# Altium PCB EchoSAT 2 PCB.PcbDoc
Units mm, origin at the board's own origin, x right, y up, seen from the top; angles counter-clockwise.
Board outline 47.6 x 56 mm, 2 copper layers (Top Layer, Bottom Layer); 45 components, 44 nets, 192 pads, 21 vias.
Unrouted connection lines stored in the file: 33.
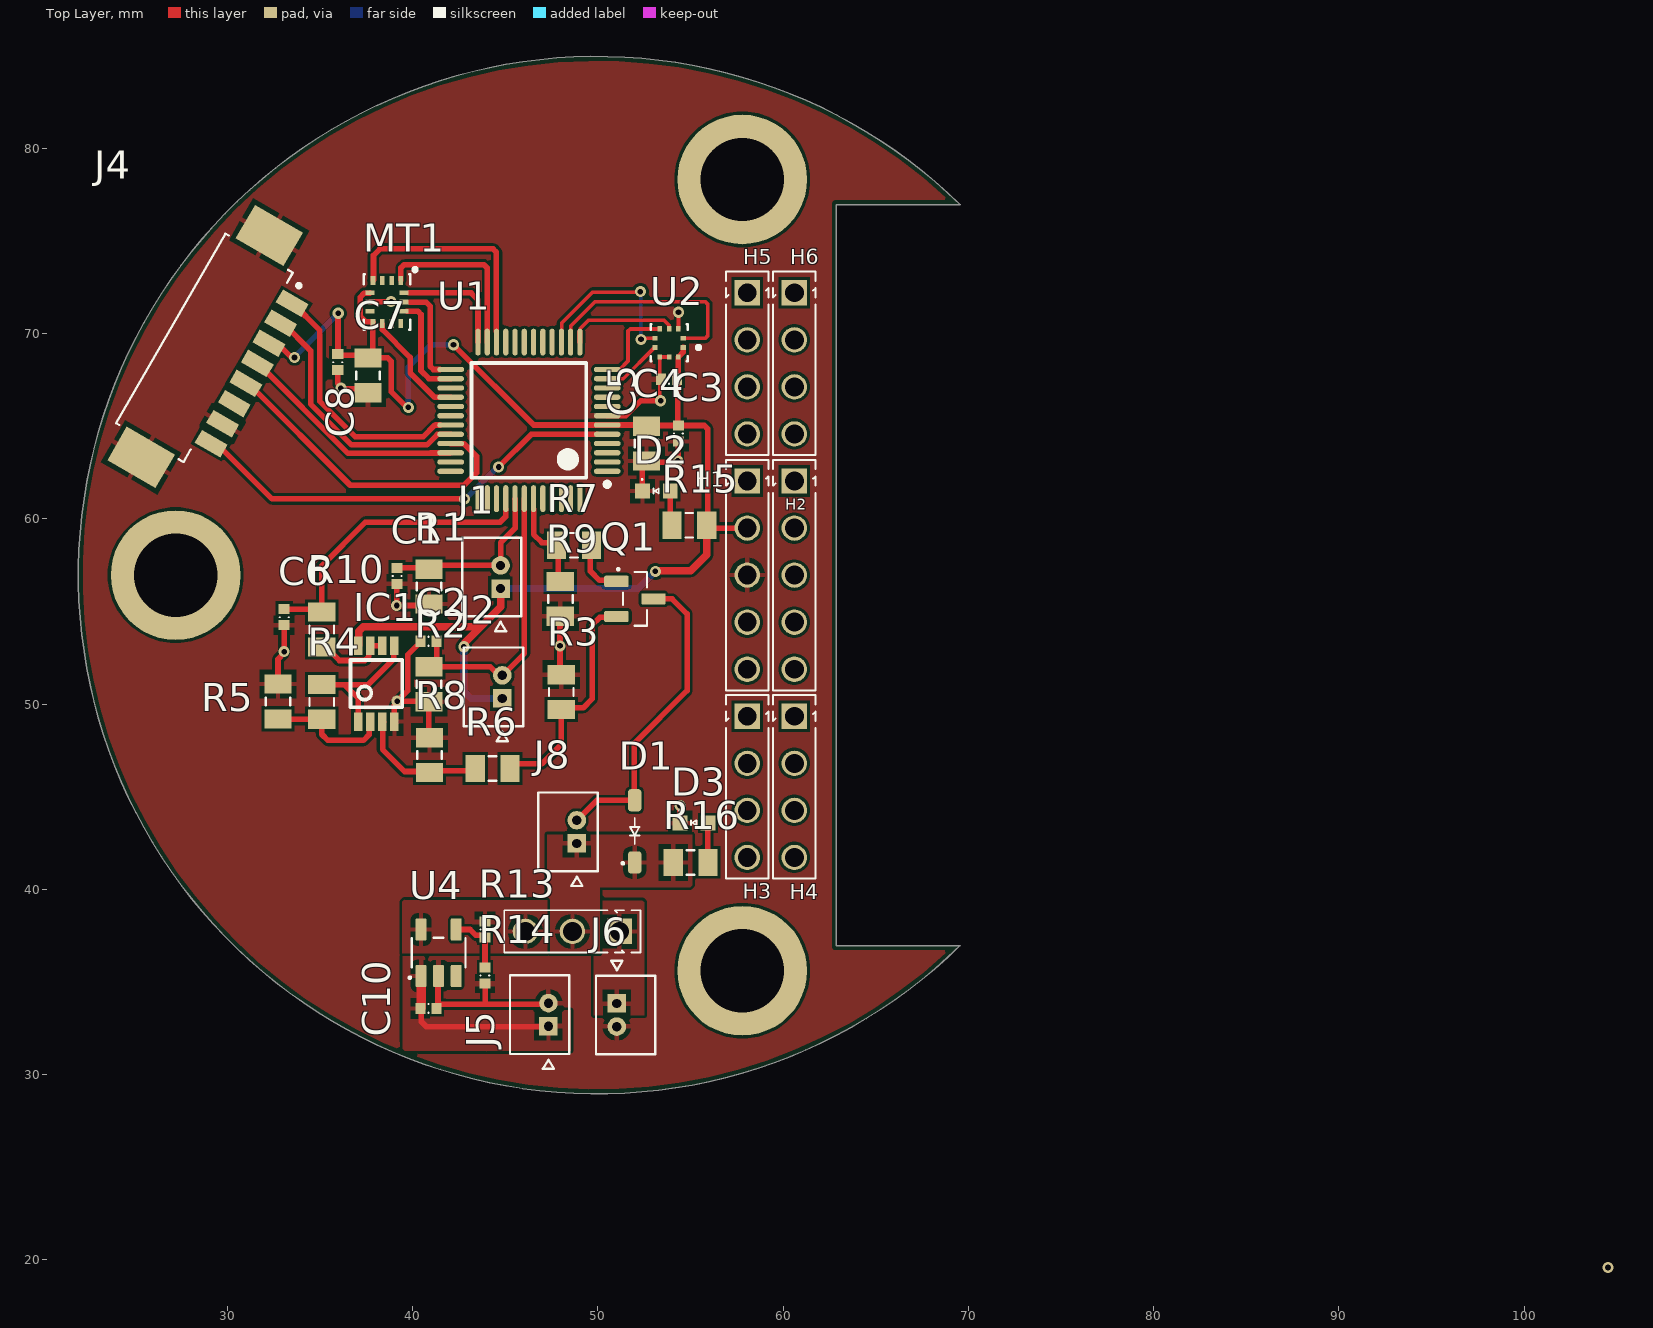
[diagram p0: Top Layer view]
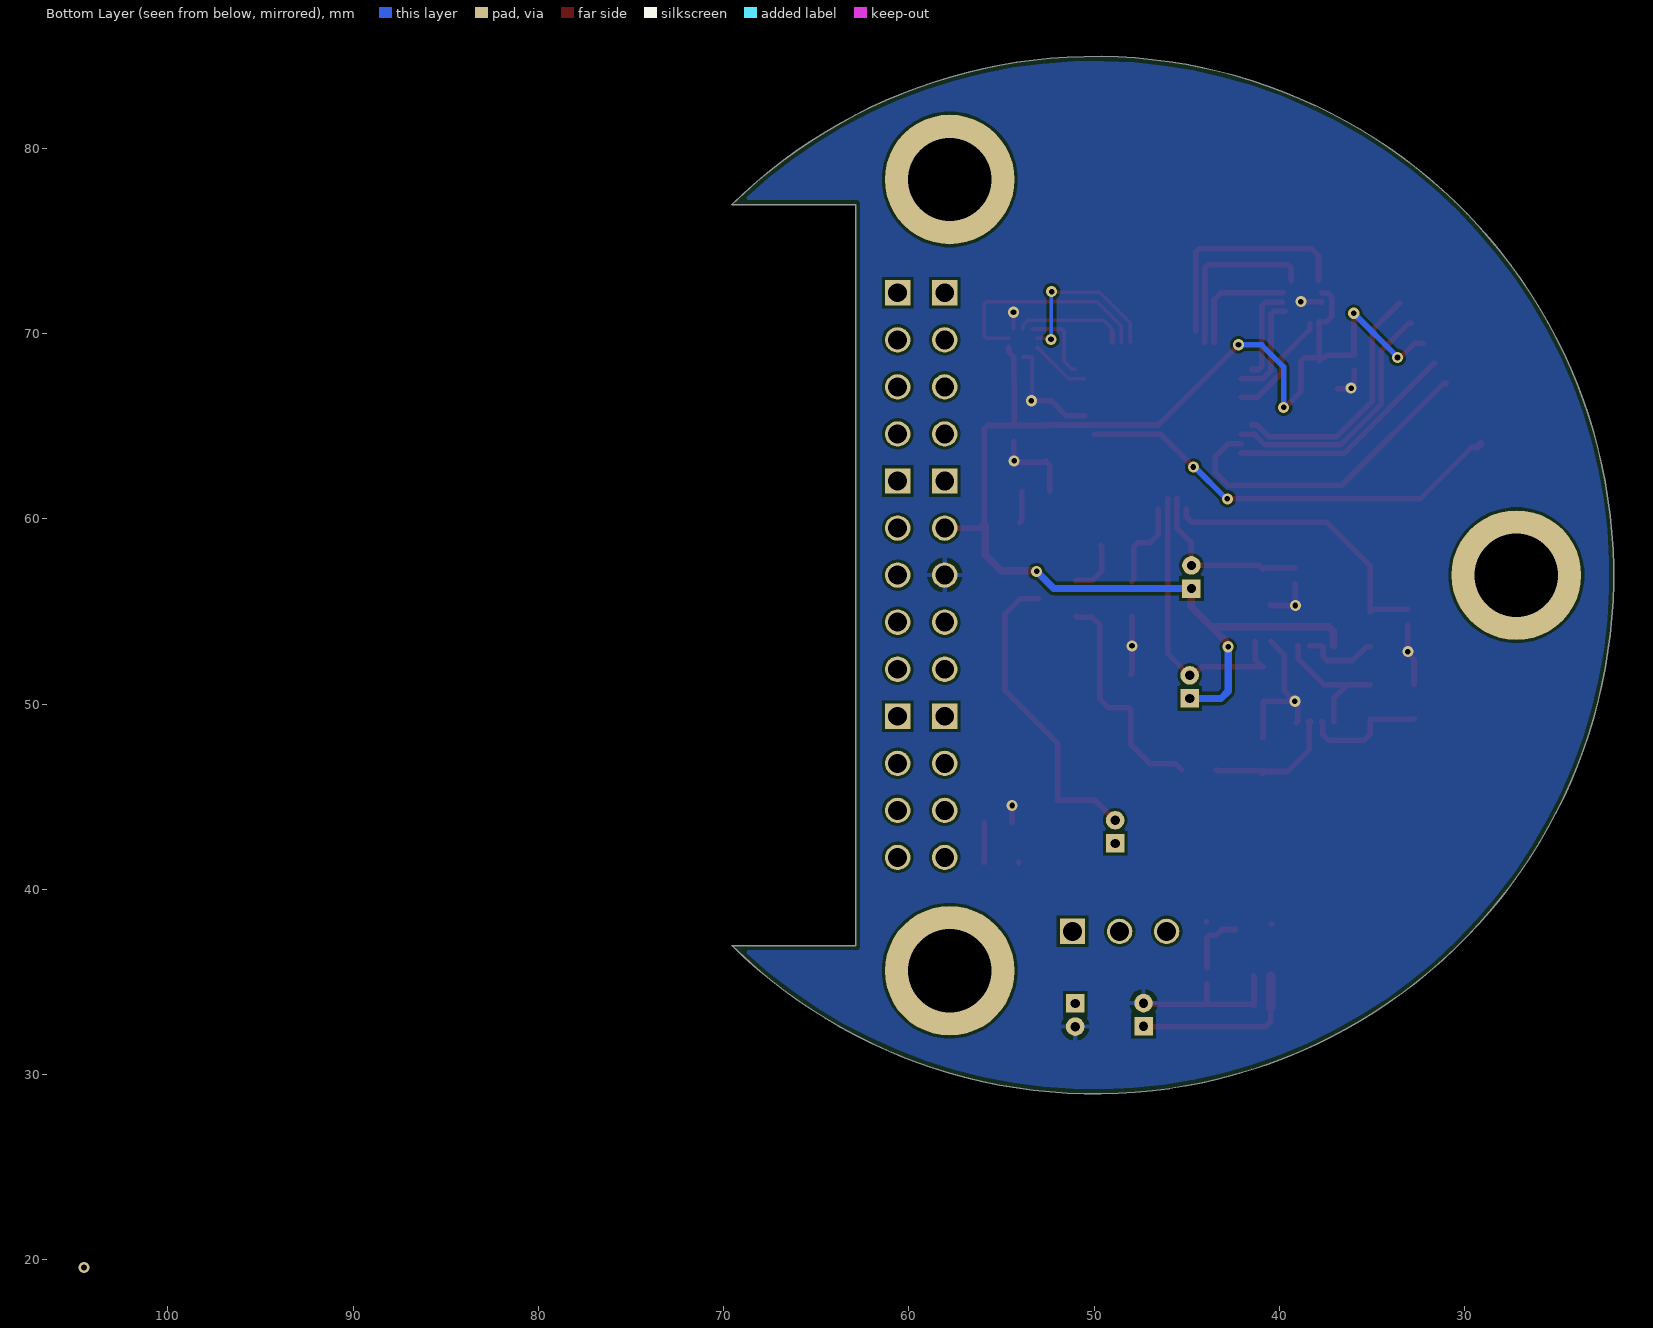
[diagram p1: Bottom Layer view, seen from below]
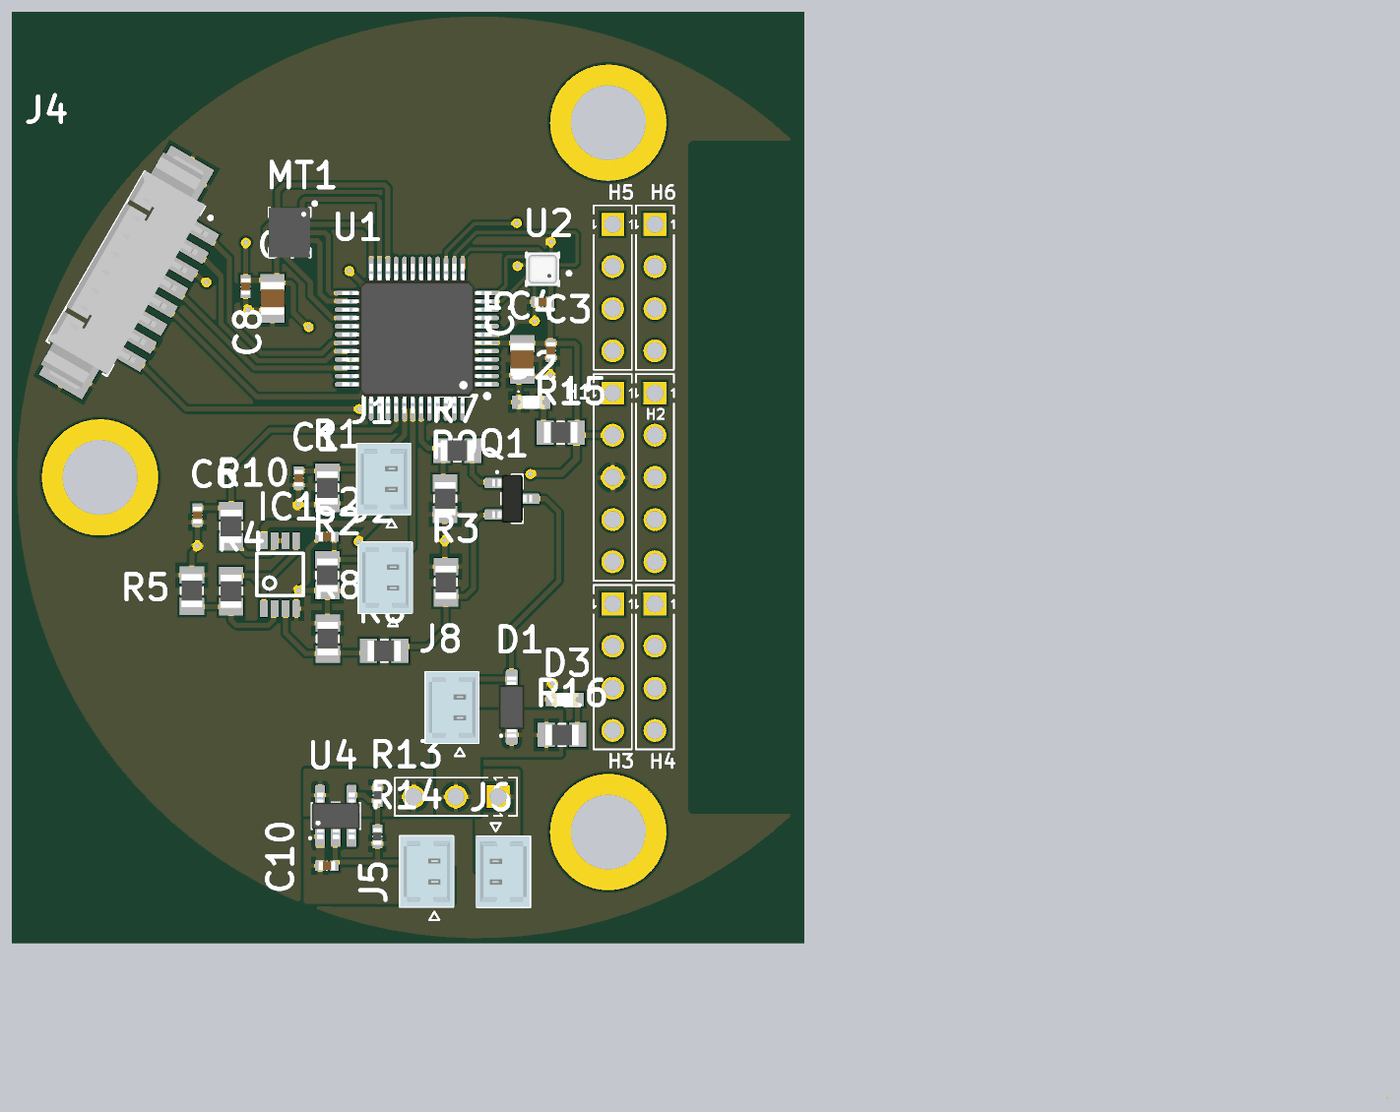
[diagram p2: 3D render of the assembled board from above, using the file's embedded part models]

## Layer stack, top to bottom
Top Solder: solder mask 0.0102, Solder Resist, Dk 3.5
Top Layer: signal copper 0.0356
Dielectric 1: dielectric 0.32, FR-4, Dk 4.8
Bottom Layer: signal copper 0.0356
Bottom Solder: solder mask 0.0102, Solder Resist, Dk 3.5

## Board outline
69.56,36.96 cw(c49.964,56.96) 69.56,76.96 69.564,76.96 62.877,76.96 62.877,36.96

## Design rules (kind name [scope] priority, off if disabled: settings)
BoardOutlineClearance [All] p1: gap=0.254 ignorepadtopadclearanceinfootprint=FALSE except(0: Arc-SplitContinuation Track-SplitContinuation SMDPad-SplitContinuation THPad-SplitContinuation Via-SplitContinuation Fill-SplitContinuation Poly-SplitContinuation Region-SplitContinuation Text-SplitContinuation)
Clearance [All] p1: gap=0.152 ignorepadtopadclearanceinfootprint=FALSE
ComponentClearance [All] p1: gap=0.1 collisioncheckmode=3 verticalgap=0.254 showdistances=FALSE
HoleSize [All] p1: absolutevalues=TRUE maxlimit=6.2 minlimit=0.3 maxpercent=80.000 minpercent=20.000
MinimumAnnularRing [All] p1: minimumring=0.15
MinimumSolderMaskSliver [All] p1: minsoldermaskwidth=0.1
PolygonConnect ViaConnect [IsVia] p1: connectstyle=Direct reliefconductorwidth=0.254 reliefentries=4 polygonreliefangle="90 Angle" airgapwidth=0.254
PolygonConnect [All] p2: connectstyle=Relief reliefconductorwidth=0.254 reliefentries=4 polygonreliefangle="90 Angle" airgapwidth=0.254
RoutingVias [All] p1: holewidth=0.3 width=0.6 viastyle="Through Hole" minholewidth=0.3 minwidth=0.5 maxholewidth=1 maxwidth=5
SilkToSilkClearance [All] p1: silktosilkclearance=0.1
SilkToSolderMaskClearance [IsPad] p1: minsilkscreentomaskgap=0.1 clearancetoexposedcopper=TRUE
SolderMaskExpansion [All] p1: expansion=0.051 istentingtop=FALSE
SupplyNets "Schematic Supply Nets_7" [InNet('V_Reg')] p1: voltage=0.000
SupplyNets "Schematic Supply Nets_6" [InNet('5V')] p2: voltage=0.000
SupplyNets "Schematic Supply Nets_5" [InNet('VBat_Reg')] p3: voltage=0.000
SupplyNets "Schematic Supply Nets_4" [InNet('1V8')] p4: voltage=0.000
SupplyNets "Schematic Supply Nets_3" [InNet('GND')] p5: voltage=0.000
SupplyNets "Schematic Supply Nets_2" [InNet('V_Coil')] p6: voltage=0.000
SupplyNets "Schematic Supply Nets_1" [InNet('3V3')] p7: voltage=0.000
SupplyNets "Schematic Supply Nets" [InNet('VBat')] p8: voltage=0.000
Width [All] p1: maxlimit=25.4 minlimit=0.15 preferedwidth=0.3
25 further rules are at their usual default settings.

## Classes and differential pairs
component class "EchoSAT 2 PCB": C1 C2 C3 C4 C5 C6 C7 C8 C10 D1 D2 D3 H1 H2 H3 H4 H5 H6 J1 J2 J4 J5 J6 J8 MT1 Q1 R1 R2 R3 R4 R5 R6 R7 R8 R9 R10 R14 R15 R16 U1 U2 U4

## Components (designator, comment, footprint, x,y, rotation, side; value= is the part's Value field where it differs from the comment)
C1 "100nF" CAPACITOR_0402_1005M_55N 39.167,56.921 r90 top
C2 "100nF" CAPACITOR_0402_1005M_55N 40.869,53.391 r0 top
C3 "100nF" CAPACITOR_0402_1005M_55N 54.354,64.603 r90 top
C4 "22uF" CAPACITOR_0805_2012M-70N 52.624,64.059 r90 top
C5 "100nF" CAPACITOR_0402_1005M_55N 53.853,67.531 r0 top
C6 "100nF" CAPACITOR_0402_1005M_55N 33.071,54.686 r90 top
C7 "22uF" CAPACITOR_0805_2012M-70N 37.592,67.742 r90 top
C8 "100nF" CAPACITOR_0402_1005M_55N 35.966,68.453 r90 top
C10 "100nF" CAPACITOR_0402_1005M_55N 40.869,33.571 r180 top
D1 "BZT52C5V1-TP" SOD123-1.35mm-N 51.994,43.129 r90 top value=5.1V
D2 "LTST-C190 Series" LED_0603_1608M_0.80mm 53.162,61.493 r0 top
D3 "LTST-C190 Series" LED_0603_1608M_0.80mm 55.194,43.586 r0 top
H1 "HDR,2.54mm,1x5" HEADER_2.54MM_1x5PIN 58.071,56.96 r270 top locked
H2 "HDR,2.54mm,1x5" HEADER_2.54MM_1x5PIN 60.611,56.96 r270 top locked
H3 "HDR,2.54mm,1x4" HEADER_2.54MM_1x4PIN 58.071,45.53 r270 top locked
H4 "HDR,2.54mm,1x4" HEADER_2.54MM_1x4PIN 60.611,45.53 r270 top locked
H5 "HDR,2.54mm,1x4" HEADER_2.54MM_1x4PIN 58.071,68.39 r270 top locked
H6 "HDR,2.54mm,1x4" HEADER_2.54MM_1x4PIN 60.611,68.39 r270 top locked
IC1 "NCS2333DMR2G" *MSOP8 38.049,51.105 r0 top
J1 "0530470210" MOLEX_0530470210 44.755,56.861 r270 top
J2 "0530470210" MOLEX_0530470210 44.849,50.927 r270 top
J4 "0532610871" MOLEX_0532610871 28.805,69.296 r240 top
J5 "0530470210" MOLEX_0530470210 47.338,33.232 r270 top
J6 "0530470210" MOLEX_0530470210 51.029,33.213 r90 top
J8 "0530470210" MOLEX_0530470210 48.87,43.104 r270 top
MT1 "ICM-42670-P" XDCR_ICM-42670-P 38.621,71.702 r270 top
Q1 "AS2312" SOT23-3N-1.15mm 52.01,55.677 r0 top
R1 "10k" RESISTOR_0805_2012M-50N 40.894,56.337 r90 top
R2 "*" RESISTOR_0805_2012M-50N 40.886,51.069 r90 top
R3 "*" RESISTOR_0805_2012M-50N 48.031,50.647 r270 top
R4 "*" RESISTOR_0805_2012M-50N 35.103,50.114 r90 top
R5 "*" RESISTOR_0805_2012M-50N 32.741,50.14 r90 top
R6 "*" RESISTOR_0805_2012M-50N 44.322,46.519 r0 top
R7 "*" RESISTOR_0805_2012M-50N 48.717,58.572 r0 top
R8 "*" RESISTOR_0805_2012M-50N 40.919,47.244 r90 top
R9 "*" RESISTOR_0805_2012M-50N 47.981,55.677 r90 top
R10 "*" Resistor_0805_2012M-50N 35.103,54.026 r90 top
R13 "*" RESISTOR_0402_1005M_37N 43.919,37.822 r90 top
R14 "*" RESISTOR_0402_1005M_37N 43.909,35.34 r90 top
R15 "*" RESISTOR_0805_2012M-50N 54.942,59.653 r0 top
R16 "*" RESISTOR_0805_2012M-50N 55.016,41.453 r180 top
U1 "MSP430FR2355TPT" LQFP_PT_48_N 46.286,65.313 r180 top
U2 "BMP390L" XDCR_BMP390L 53.853,69.496 r270 top
U4 "TLV75801PDBVR" SOT23-5N-1.45mm 41.409,36.577 r90 top
? "HDR,2.54mm,1x3" HEADER_2.54MM_1x3PIN 48.633,37.728 r180 top locked

## Footprints (in the part's own frame and the unit in brackets; to place one, negate y for a bottom-side part, rotate by r counter-clockwise, add the part's x,y. Pads: shape width x height; smd on the part's side, far side on the other; paste and mask are expansions set on the pad)
*MSOP8 [mm]
  rect 0.45x1 smd: 1(-0.975,-2.05) 2(-0.325,-2.05) 3(0.325,-2.05) 4(0.975,-2.05) 5(0.975,2.05) 6(0.325,2.05) 7(-0.325,2.05) 8(-0.975,2.05)
  silkscreen extent -1.4,-1.27 1.4,1.27
CAPACITOR_0402_1005M_55N [mm] "Capacitor, 0402 (1005 metric), 0.55mm height, nominal pads"
  rect 0.54x0.6 smd mask+0.051: 1(-0.432,0) 2(0.432,0)
  silkscreen extent 0,-0.25 0,0.25, body extent -0.5,-0.28 0.5,0.27, height 0.48
CAPACITOR_0805_2012M-70N [mm] "Capacitor, 0805 (2012 metric), 0.7mm high, nominal pads,"
  rect 1.04x1.47 smd mask+0.051: 1(-0.94,0) 2(0.94,0)
  silkscreen extent -0.2,-0.64 0.2,0.64, body extent -1,-0.73 1,0.73, height 1.23
HEADER_2.54MM_1x3PIN [mm]
  rect 1.37x1.37 hole 1.02: 1(-2.54,0)
  round 1.37 hole 1.02: 2(0,0) 3(2.54,0)
  silkscreen extent -3.68,-1.14 3.68,1.14, body extent -3.68,-1.14 3.68,1.14, height 8.2
HEADER_2.54MM_1x4PIN [mm]
  rect 1.37x1.37 hole 1.02: 1(-3.81,0)
  round 1.37 hole 1.02: 2(-1.27,0) 3(1.27,0) 4(3.81,0)
  silkscreen extent -4.95,-1.14 4.95,1.14, body extent -4.95,-1.14 4.95,1.14, height 8.2
HEADER_2.54MM_1x5PIN [mm]
  rect 1.37x1.37 hole 1.02: 1(-5.08,0)
  round 1.37 hole 1.02: 2(-2.54,0) 3(0,0) 4(2.54,0) 5(5.08,0)
  silkscreen extent -6.22,-1.14 6.22,1.14, body extent -6.21,-1.14 6.22,1.14, height 8.2
LED_0603_1608M_0.80mm [mm] "LED, 0603 (1608 metric), 0.8mm high"
  rect 0.8x0.8 smd mask+0.051: A(0.75,0) C(-0.75,0)
  silkscreen extent -0.79,-0.12 0.13,0.66, body extent -0.8,-0.4 0.8,0.4, height 0.8
LQFP_PT_48_N [mm]
  oval 1.45x0.28 smd paste+0 mask+0.051: 1(-4.225,2.75) 2(-4.225,2.25) 3(-4.225,1.75) 4(-4.225,1.25) 5(-4.225,0.75) 6(-4.225,0.25) 7(-4.225,-0.25) 8(-4.225,-0.75) 9(-4.225,-1.25) 10(-4.225,-1.75) 11(-4.225,-2.25) 12(-4.225,-2.75) 25(4.225,-2.75) 26(4.225,-2.25) 27(4.225,-1.75) 28(4.225,-1.25) 29(4.225,-0.75) 30(4.225,-0.25) 31(4.225,0.25) 32(4.225,0.75) 33(4.225,1.25) 34(4.225,1.75) 35(4.225,2.25) 36(4.225,2.75)
  oval 0.28x1.45 smd paste+0 mask+0.051: 13(-2.75,-4.225) 14(-2.25,-4.225) 15(-1.75,-4.225) 16(-1.25,-4.225) 17(-0.75,-4.225) 18(-0.25,-4.225) 19(0.25,-4.225) 20(0.75,-4.225) 21(1.25,-4.225) 22(1.75,-4.225) 23(2.25,-4.225) 24(2.75,-4.225) 37(2.75,4.225) 38(2.25,4.225) 39(1.75,4.225) 40(1.25,4.225) 41(0.75,4.225) 42(0.25,4.225) 43(-0.25,4.225) 44(-0.75,4.225) 45(-1.25,4.225) 46(-1.75,4.225) 47(-2.25,4.225) 48(-2.75,4.225)
  silkscreen extent -4.35,-3.1 3.1,3.57, body extent -4.5,-4.5 4.5,4.5, height 1.6
MOLEX_0530470210 [mm]
  rect 1x1 hole 0.5 mask+0.051: 1(0.625,0)
  round 1 hole 0.5 mask+0.051: 2(-0.625,0)
  silkscreen extent -2.12,-2.07 2.93,1.13, body extent -2.12,-2.06 2.13,1.14, height 4.21
MOLEX_0532610871 [mm] "Header - Picoblade 08-pin, SMT, RA, 3.4mm height"
  rect 0.8x1.6 smd mask+0.051: 1(-4.375,2.9) 2(-3.125,2.9) 3(-1.875,2.9) 4(-0.625,2.9) 5(0.625,2.9) 6(1.875,2.9) 7(3.125,2.9) 8(4.375,2.9)
  rect 2.1x3 smd mask+0.051: MP1(-6.925,0) MP2(6.905,0)
  silkscreen extent -5.83,-2.1 5.99,2.83, body extent -7.57,-2.1 7.58,3.1, height 3.42
RESISTOR_0402_1005M_37N [mm] "Resistor, 0402 (1005 metric), 0.37mm height, nominal pads"
  rect 0.54x0.6 smd mask+0.051: 1(-0.432,0) 2(0.432,0)
  silkscreen extent 0,-0.25 0,0.25, body extent -0.5,-0.25 0.5,0.25, height 0.37
RESISTOR_0805_2012M-50N [mm] "Resistor, 0805 (2012 metric), nominal pads"
  rect 1.04x1.47 smd mask+0.051: 1(-0.94,0) 2(0.94,0)
  silkscreen extent -0.2,-0.66 0.2,0.66, body extent -1,-0.63 1,0.62, height 0.5
Resistor_0805_2012M-50N [mm] "Resistor, 0805 (2012 metric), nominal pads"
  rect 1.04x1.47 smd mask+0.051: 1(-0.94,0) 2(0.94,0)
  silkscreen extent -0.2,-0.66 0.2,0.66, body extent -1,-0.63 1,0.62, height 0.5
SOD123-1.35mm-N [mm] "SOD-123, 1.35mm high, nominal pads"
  rrect50% 1.21x0.73 smd mask+0.051: A(1.68,0) C(-1.68,0)
  silkscreen extent -1.75,-0.25 0.74,0.66, body extent -1.83,-0.78 1.82,0.77, height 1.5
SOT23-3N-1.15mm [mm] "SOT23, 3-pin, 1.15mm high, nominal pads"
  rrect25% 1.32x0.6 smd mask+0.051: 1(-1,0.95) 2(-1,-0.95) 3(1,0)
  silkscreen extent -0.93,-1.45 0.65,1.63, body extent -1.19,-1.45 1.21,1.45, height 0.91
SOT23-5N-1.45mm [mm] "SOT23, 5 pins, nominal pads, 1.45mm high"
  rrect25% 1.21x0.59 smd mask+0.051: 1(-1.255,0.95) 2(-1.255,0) 3(-1.255,-0.95) 4(1.255,-0.95) 5(1.255,0.95)
  silkscreen extent -1.37,-1.45 0.8,1.57, body extent -1.4,-1.45 1.4,1.45, height 1.45
XDCR_BMP390L [mm]
  rect 0.25x0.275 smd: 1(0.25,0.763) 2(-0.25,0.763) 6(-0.25,-0.763) 7(0.25,-0.763)
  rect 0.275x0.25 smd: 3(-0.763,0.5) 4(-0.763,0) 5(-0.763,-0.5) 8(0.763,-0.5) 9(0.763,0) 10(0.763,0.5)
  silkscreen extent -1,-1 1,1.69, body extent -1,-1 1,1, height 0.8
XDCR_ICM-42670-P [mm]
  rect 0.475x0.25 smd paste-1 mask+0.05: 1(-1.162,0.75) 2(-1.162,0.25) 3(-1.162,-0.25) 4(-1.162,-0.75) 8(1.162,-0.75) 9(1.162,-0.25) 10(1.162,0.25) 11(1.162,0.75)
  rect 0.25x0.475 smd paste-1 mask+0.05: 5(-0.5,-0.913) 6(0,-0.913) 7(0.5,-0.913) 12(0.5,0.913) 13(0,0.913) 14(-0.5,0.913)
  silkscreen extent -1.85,-1.25 1.5,1.61, body extent -1.5,-1.25 1.5,1.25, height 0.81

## Part data
C1 C2 C3 C5 C6 C8 C10: library part "GCM1555CxxxxxF Series", "Passive - Capacitor Series, C0G, 5pF ~ 1nF, 50V, 0402 (1005 Metric), ±1%, -55°C ~ 125°C", Capacitance at Rated Voltage=100%, Package=0402, Rated Voltage=50V, Temp Range="-55°C ~ 125°C", Temperature Coefficient=C0G, Tolerance=±1%, Value Range="5pF ~ 1nF", APSS Standard Part="APSS Standard", E Series=E24, Supplier 1=Digikey
C4 C7: library part C0805C226M9PACTU, "Passive - Capacitor, X5R, 22uF Max, 6.3V, 0805 (2012 Metric), ±20%, -55°C ~ 85°C. 8.8uF @ 5V", Capacitance at Rated Voltage=30%, Package=0805, Rated Voltage=6.3V, Supplier 1 Part No.=399-C0805C226M9PAC7800CT-ND, Temp Range="-55°C ~ 85°C", Temperature Coefficient=X5R, Tolerance=±20%, APSS Standard Part="APSS Standard", MF Part No.=C0805C226M9PACTU, Supplier 1=Digikey
D1: "Diode - Zener, 5V1, SOD-123", Package=SOD-123, Supplier 1 Part No.=BZT52C5V1-TPMSCT-ND, Temp Range="-65°C ~ 150°C", APSS Standard Part="APSS Standard", MF Part No.=BZT52C5V1-TP, Supplier 1=Digikey
D2 D3: "Diode - LED, 0603", Package=0603, Rated Voltage="5V Reverse", Temp Range="-30°C ~ 85°C", APSS Standard Part="APSS Standard", Supplier 1=Digikey
H1 H2: "Connector - 2.54mm, 1x5-pin"
H3 H4 H5 H6: "Connector - 2.54mm, 1x4-pin"
J1 J2 J5 J6 J8: "Connector - Picoblade 02-pin, TH, STR", Supplier 1 Part No.=WM1731-ND, APSS Standard Part="APSS Standard", MF Part No.=0530470210, Mounting Type=Through-hole, Orientation=Straight, Pins=2, Pitch=1.25mm, Supplier 1=Digikey
J4: "Connector - Picoblade 08-pin, SMT, RA", Supplier 1 Part No.=WM7626CT-ND, APSS Standard Part="APSS Standard", MF Part No.=0532610871, Mounting Type="Surface Mount", Orientation="Right Angle", Pins=8, Pitch=1.25mm, Supplier 1=Digikey
MT1: Package=None, Availability=Unavailable, MP=ICM-42670-P, Price=None
Q1: "Transistor - MOSFET, N-Channel AS2312", Package=SOT-23-3, Power=1.2W, Rated Voltage="20 Vds", Supplier 1 Part No.=4530-AS2312CT-ND, Temp Range="0°C ~ 150°C (TJ)", APSS Standard Part="APSS Standard", MF Part No.=AS2312, Supplier 1=Digikey
R1 R2 R3 R4 R5 R6 R7 R8 R9 R10 R15 R16: library part "Generic Resistor", "Passive - Resistor, Generic", Tolerance=?%
R13 R14: library part "RMCF0402JT Series", "Passive - Resistor Series, 0402, 5%, 1R - 20M, E24, 0.063W, 1/16W, ±100ppm/°C, -55°C ~ 155°C, 0402 (1005 Metric)", Package=0402, Power=1/16W, Rated Voltage=50V, Temp Range="-55°C ~ 155°C", Temperature Coefficient=±100ppm/°C, Tolerance=5%, Value Range="1 ~ 20M", APSS Standard Part="APSS Standard", E Series=E24, Supplier 1=Digikey
U1: "IC - Microcontroller, LQFP-48, 24MHz, 32KB FRAM, Op-Amps/PGAs, 12-bit DACs, 12-bit ADC, -40 to 105C", Package=LQFP-48, Rated Voltage=3.6V, Supplier 1 Part No.=296-50260-ND, Temp Range="-40°C ~ 105°C", APSS Standard Part="APSS Standard", MF Part No.=MSP430FR2355TPT, Supplier 1=Digikey
U2: "Pressure Sensor 4.35PSI ~ 18.13PSI (30kPa ~ 125kPa) Absolute - - 10-WFLGA", Package=None, Check_prices=https://www.snapeda.com/parts/BMP390L/Bosch+Sensortec/view-part/?ref=eda, MF="Bosch Sensortec", MP=BMP390L, SnapEDA_Link=https://www.snapeda.com/parts/BMP390L/Bosch+Sensortec/view-part/?ref=snap
U4: "IC - Regulator, LDO, 500 mA, Low Quiescent Current, SOT23-5", Package=SOT-23-5, Rated Voltage=6V, Supplier 1 Part No.=296-TLV75801PDBVRCT-ND, Temp Range="-40°C ~ 125°C (TJ)", APSS Standard Part="APSS Standard", MF Part No.=TLV75801PDBVR, Supplier 1=Digikey
?: "Connector - 2.54mm, 1x3-pin"
IC1: Check_prices=https://www.snapeda.com/parts/NCS2333DMR2G/Onsemi/view-part/?ref=eda, SnapEDA_Link=https://www.snapeda.com/parts/NCS2333DMR2G/Onsemi/view-part/?ref=snap

## Free pads (board coordinates)
  round 7 hole 4.5: 1(27.214,56.96) 1(57.801,35.603) 1(57.802,78.318)

## Via types
v1: diameter 0.6, hole 0.3, Top Layer to Bottom Layer, 21 vias

## Nets (pads, with @x,y where several pads share a name; then routed paths per layer and width w, separated by ;. In a path a pad name is that pad's centre, name@x,y a point inside that pad or via, vN(x,y) a via of type N, cw(c..) or ccw(c..) an arc to the next point about the centre after c; other vN are vias at no path point)
1V8: H1.1
3V3: C3.2 C4.2 C5.2 C7.2 C8.2 H1.2 IC1.8 J1.1 J2.1 J4.3 MT1.5 MT1.8 R15.2 U1.6 U2.1 U2.10 | length 79.8
  Top Layer w0.3: J4.3 32.713,69.47 33.418,68.764 33.572,68.764 v1(33.63,68.707) ; v1(35.992,71.095) 35.979,71.082 35.979,68.932 35.95,68.903 35.992,68.86 35.966,68.835 37.439,68.835 C7.2 C7.2@37.853,68.682 ; MT1.5 37.684,72.177 37.394,72.177 37.169,71.952 37.169,70.952 37.494,70.627 37.846,70.627 37.871,70.602 MT1.8 37.871,70.477 MT1.8@37.846,70.452 ; C7.2@37.853,68.54 C7.2@37.853,68.682 ; MT1.8@37.853,70.452 C7.2@37.853,68.682 ; v1(39.776,66.015) 39.699,66.015 38.85,66.863 38.85,68.506 38.674,68.682 C7.2@37.853,68.682 ; v1(42.215,69.393) 46.544,65.063 U1.6 52.235,65.063 52.237,65.065 C4.2@52.624,65.065 ; C4.2 52.661,65.035 55.753,65.035 55.929,64.86 55.929,59.815 R15.2@55.906,59.792 ; U2.10 54.616,68.996 U2.1 ; C3.2@54.354,65.049 54.32,65.084 54.32,67.496 54.354,67.531 U2.10 ; R15.2@55.963,59.734 56.197,59.5 H1.2
  Top Layer w0.4: IC1.8 37.099,53.18 37.099,53.94 37.334,54.175 43.68,54.175 ; v1(42.774,53.093) 42.812,53.131 42.812,53.306 43.68,54.175 ; J1.1 44.755,55.249 43.68,54.175 ; v1(53.115,57.16) 53.153,57.198 55.028,57.198 55.882,58.052 R15.2
  Bottom Layer w0.3: v1(33.63,68.707) 33.63,68.732 v1(35.992,71.095) ; v1(39.776,66.015) 39.776,68.201 40.969,69.393 v1(42.215,69.393)
  Bottom Layer w0.4: v1(42.774,53.093) 42.774,50.684 43.156,50.302 J2.1 ; J1.1 52.19,56.236 v1(53.115,57.16)
5V: H1.4
ACCL_CLK: MT1.13 U1.25 | length 5
  Top Layer w0.3: 39.844,71.683 40.748,71.683 40.949,71.482 40.949,68.234 41.125,68.058 U1.25@41.486,68.058
ACCL_CS: MT1.12 U1.26 | length 5.7
  Top Layer w0.3: MT1.12@39.701,71.214 40.283,71.214 40.459,71.039 40.459,67.992 40.884,67.566 41.486,67.566 41.489,67.563 U1.26
ACCL_INT1: MT1.4 U1.22 | length 12.5
  Top Layer w0.3: MT1.4 37.896,72.889 37.896,74.224 38.238,74.565 44.348,74.565 44.526,74.387 44.526,70.133 U1.22@44.526,70.113
ACCL_INT2: MT1.9 U1.28 | length 6
  Top Layer w0.3: MT1.9 38.371,70.209 39.871,68.709 39.871,67.883 41.192,66.563 U1.28
ACCL_MISO: MT1.1 U1.23 | length 9.5
  Top Layer w0.3: MT1.1 39.371,73.54 39.547,73.716 43.86,73.716 44.036,73.54 U1.23
ACCL_MOSI: MT1.14 U1.24 | length 6.2
  Top Layer w0.3: 39.794,72.192 43.161,72.192 43.536,71.817 U1.24
BMP_CLK: U1.14 U2.2 | length 11.9
  Top Layer w0.2: U1.14@48.546,69.548 48.546,70.408 49.851,71.713 55.814,71.713 55.931,71.596 55.931,69.863 55.814,69.746 54.653,69.746 U2.2
BMP_CS: U1.15 U2.6 | length 9.4
  Top Layer w0.2: U1.15@48.046,69.548 48.051,69.553 48.051,70.569 49.715,72.232 52.266,72.232 v1(52.299,72.266) ; v1(52.334,69.685) 52.395,69.747 U2.6@53.089,69.747
  Bottom Layer w0.2: v1(52.299,72.266) 52.316,72.248 52.316,69.702 v1(52.334,69.685)
BMP_INT: U1.11 U2.7 | length 3.3
  Top Layer w0.2: U1.11 51.382,67.563 53.04,69.221 53.066,69.221 U2.7
BMP_MISO: U1.12 U2.5 | length 4.2
  Top Layer w0.2: U1.12@51.025,68.075 51.029,68.078 51.198,68.078 51.638,68.519 51.638,70.134 51.755,70.251 U2.5@53.353,70.251
BMP_MOSI: U1.13 U2.4 | length 6
  Top Layer w0.2: U1.13@49.036,70.103 49.051,70.118 49.051,70.276 49.486,70.711 53.591,70.711 53.853,70.448 U2.4
  Top Layer w0.3: U1.13 U1.13@49.036,70.103
GND: C1.1 C2.1 C3.1 C4.1 C5.1 C6.1 C7.1 C8.1 C10.1 D2.C D3.C H1.3 IC1.4 J4.7 J4.MP1 J4.MP2 J5.2 J6.2 MT1.6 R1.1 R2.1 R3.1 R5.2 R8.2 R9.1 R14.1 U1.7 U2.3 U2.8 U2.9 U4.2 | length 41.9
  Top Layer w0.2: v1(53.391,66.37) 53.353,66.408 U2.8 U2.9 ; U2.3 54.356,70.261 54.356,71.148 v1(54.358,71.151)
  Top Layer w0.3: R5.2 32.741,52.421 33.071,52.751 C6.1 ; C8.1 35.966,67.304 36.131,67.14 v1(36.131,67.058) 36.159,67.03 C7.1@36.881,67.03 ; MT1.6 37.721,71.714 38.832,71.714 v1(38.844,71.727) ; IC1.4@39.091,48.988 IC1.4 39.024,49.924 39.172,50.072 v1(39.172,50.153) ; v1(39.141,55.321) v1@39.167,55.347 ; C1.1 39.154,56.477 39.154,55.359 v1@39.167,55.347 ; C2.1 40.437,53.361 39.747,52.671 39.747,50.729 v1(39.172,50.153) ; R1.1@40.509,55.363 40.468,55.321 39.192,55.321 v1@39.167,55.347 ; R8.2 40.886,48.217 R2.1 40.862,50.153 v1(39.172,50.153) ; C10.1@41.355,33.763 41.388,33.796 43.925,33.796 ; C10.1@41.377,33.738 41.377,35.29 U4.2 ; R14.1@43.925,34.892 43.925,33.796 ; J5.2 47.277,33.796 43.925,33.796 ; R9.1 47.961,54.717 v1(47.961,53.143) 47.961,51.657 R3.1 ; U1.7 50.521,65.573 51.516,65.573 52.313,66.37 v1(53.391,66.37) ; D2.C 52.412,62.907 C4.1 52.681,63.062 54.183,63.062 54.244,63.123 v1(54.325,63.123) 54.34,63.138 54.34,64.157 C3.1 ; v1(54.435,44.525) 54.44,44.52 54.44,43.591 D3.C
  other v1: 104.532,19.586 33.071,52.832
Isense: Q1.2 R3.2 R6.2 | length 12.6
  Top Layer w0.3: R6.2@45.288,46.457 45.609,46.777 46.98,46.777 48.031,47.828 R3.2 48.127,49.803 49.226,49.803 49.7,50.277 49.7,54.268 50.108,54.676 50.959,54.676 Q1.2
NetD1_A: D1.A J8.2 Q1.3 | length 17
  Top Layer w0.3: J8.2 49.95,44.809 D1.A ; D1.A@51.968,44.809 51.968,47.869 54.827,50.727 54.827,54.864 54.014,55.677 Q1.3
NetD2_A: D2.A R15.1 | length 1.7
  Top Layer w0.3: D2.A 53.912,59.905 R15.1@54.026,59.792
NetD3_A: D3.A R16.1 | length 2.1
  Top Layer w0.3: D3.A 55.944,41.465 R16.1
NetIC1_2: IC1.2 R4.1 R5.1 | length 6.7
  Top Layer w0.3: R5.1 32.766,49.174 R4.1 35.103,48.371 35.43,48.044 37.356,48.044 37.665,48.353 37.665,48.996 IC1.2
NetIC1_3: IC1.3 R6.1 R8.1 | length 7.1
  Top Layer w0.3: IC1.3@38.384,49.045 38.384,47.547 39.57,46.361 R8.1@40.849,46.361 ; R8.1 41.014,46.398 43.35,46.398 R6.1@43.408,46.457
  Top Layer w0.4: IC1.3 IC1.3@38.399,49.03 ; R8.1@40.849,46.361 R8.1@40.919,46.291
NetIC1_6: IC1.6 IC1.7 R10.1 | length 4.2
  Top Layer w0.3: R10.1 35.318,53.086 36.051,52.352 37.424,52.352 37.649,52.577 37.649,53.08 IC1.7 IC1.6
NetJ3_9: 
NetQ1_1: Q1.1 R7.2 | length 3
  Top Layer w0.3: R7.2 49.605,58.52 49.605,57.17 50.103,56.672 50.964,56.672 Q1.1@50.989,56.647
NetR13_1: R13.1 R14.2 U4.4 | length 3.4
  Top Layer w0.3: U4.4 43.104,37.832 43.426,37.51 43.799,37.51 R13.1 43.914,37.385 43.914,35.777 R14.2
PGRM_CLK: J4.5 U1.33 | length 17.6
  Top Layer w0.3: J4.5 31.151,67.305 36.642,61.813 42.786,61.813 43.459,62.487 43.459,63.375 42.782,64.053 42.071,64.053 U1.33
PGRM_Control: J4.4 U1.34 | length 12.5
  Top Layer w0.3: J4.4 31.676,68.387 36.528,63.535 40.962,63.535 40.98,63.553 42.051,63.553 U1.34
PGRM_Input: J4.2 U1.32 | length 13.8
  Top Layer w0.3: J4.2 33.026,70.552 34.505,69.073 34.505,66.198 36.715,63.988 40.775,63.988 41.34,64.553 42.051,64.553 U1.32
PGRM_Output: J4.1 U1.31 | length 13.5
  Top Layer w0.3: J4.1 33.537,71.635 35.001,70.171 35.001,66.341 36.902,64.44 40.587,64.44 41.202,65.054 41.254,65.054 41.262,65.063 U1.31@41.486,65.063
PWM_Coil: R7.1 R9.2 U1.43 | length 4.7
  Top Layer w0.3: U1.43@46.54,60.513 46.54,59.155 46.983,58.711 47.639,58.711 R7.1 ; R7.1@47.87,58.48 47.87,56.727 R9.2
Reset_PGRM: J4.8 U1.5 | length 23.5
  Top Layer w0.3: J4.8@29.329,63.857 29.639,63.857 32.417,61.079 v1(42.811,61.079) ; v1(44.647,62.795) 46.412,64.561 U1.5@49.986,64.561
  Top Layer w0.4: J4.8 J4.8@29.329,63.857
  Bottom Layer w0.3: v1(42.811,61.079) 42.87,61.079 44.602,62.811 v1@44.602,62.814
SD_CLK: U1.2
SD_CS: U1.3
SD_MISO: U1.48
SD_MOSI: U1.1
V_Coil: ?.2 D1.C J8.1 R16.2 | length 0
  Top Layer w0.3: R16.2@54.073,41.449 R16.2
V_Reg: ?.3 R13.2 U4.5 | length 0
  Top Layer w0.3: R13.2 R13.2@43.949,38.254
VBat: ?.1 J6.1
VBat_Reg: C10.2 J5.1 U4.1 | length 9.6
  Top Layer w0.3: U4.1 U4.1@40.469,35.311 ; C10.2@40.472,33.75 40.472,32.86 40.75,32.582 47.313,32.582 J5.1
  Top Layer w0.5: C10.2@40.469,33.623 U4.1@40.469,35.311
VBAT_TEMP: C1.2 J1.2 R1.2 U1.41 | length 9.6
  Top Layer w0.3: C1.2 40.818,57.353 R1.2 41.102,57.486 J1.2 44.755,58.708 45.536,59.49 45.536,61.068 U1.41@45.526,61.078
VCHA_TEMP: C2.2 J2.2 R2.2 U1.42 | length 15.8
  Top Layer w0.3: C2.2 41.301,52.379 40.931,52.009 R2.2 44.202,52.009 44.659,51.552 J2.2 46.036,52.739 U1.42
Vim: IC1.1 IC1.5 R4.2 | length 7.5
  Top Layer w0.3: R4.2 36.311,51.054 37.074,50.291 IC1.1 ; 36.316,51.05 37.613,51.05 38.989,52.426 38.989,53.12 IC1.5
Vim_Buff: C6.2 R10.2 U1.40 | length 16
  Top Layer w0.3: C6.2 34.95,55.118 R10.2 35.103,57.462 37.459,59.818 44.736,59.818 45.033,60.115 U1.40@45.033,60.513
Vraw: H1.5
pads on no net: H2.1 H2.2 H2.3 H2.4 H2.5 H3.1 H3.2 H3.3 H3.4 H4.1 H4.2 H4.3 H4.4 H5.1 H5.2 H5.3 H5.4 H6.1 H6.2 H6.3 H6.4 J4.6 MT1.2 MT1.3 MT1.7 MT1.10 MT1.11 U1.4 U1.8 U1.9 U1.10 U1.16 U1.17 U1.18 U1.19 U1.20 U1.21 U1.27 U1.29 U1.30 U1.35 U1.36 U1.37 U1.38 U1.39 U1.44 U1.45 U1.46 U1.47 U4.3

## Polygon pours and split planes (outlines as drawn)
GND on Top Layer "GND_L01_P009" (solid, pour order 9): 69.56,36.96 cw(c49.964,56.96) 69.56,76.96 69.564,76.96 62.877,76.96 62.877,36.96
VBat on Top Layer "VBAT_L01_P007" (solid, pour order 7): 49.795,39.395 49.795,33.214 52.516,33.214 52.516,39.396
V_Coil on Top Layer "V_COIL_L01_P005" (solid, pour order 5): 47.265,36.544 47.265,43.129 47.274,42.958 55.088,42.958 55.088,40.223 54.98,40.115 50.118,40.115 50.118,36.577 50.085,36.544 47.274,36.544
VBat_Reg on Top Layer "VBAT_REG_L01_P002" (solid, pour order 2): 39.461,36.283 39.461,31.774 39.475,31.759 39.465,31.291 43.976,31.263 48.53,31.291 48.53,31.759 48.53,33.173 48.53,33.47 41.451,33.47 40.84,33.47 40.688,33.694 40.719,33.722 40.715,34.244 40.811,36.272 41.451,36.258 41.466,36.272 41.455,36.283 41.452,36.283 41.452,36.273 41.451,36.537 40.443,36.537 39.461,36.537
V_Reg on Top Layer "V_REG_L01_P000" (solid, pour order 0): 39.445,39.438 39.445,36.544 47.265,36.544 47.265,36.902 47.265,39.408
GND on Bottom Layer "GND_L02_P010" (solid, pour order 10): 69.56,36.96 cw(c49.964,56.96) 69.56,76.96 69.564,76.96 62.877,76.96 62.877,36.96

## Silkscreen, mask and mechanical layers (free items; w line width, h text height)
3D Models:
  text "This is an example payload" at 40.281,89.285 h1.52
  text "Feel free to use this as template" at 38.031,87.122 h1.52
  text "Battery cutout" at 68.137,53.244 h1.52 r90
Board Outline:
  the board outline again, w0.1
Courtyard:
  lines w0.254: 63.425,37.985 63.425,75.985 71.425,75.985 71.425,37.985 63.425,37.985